# Altium PCB PCB1.PcbDoc
Units mil, origin at the board's own origin, x right, y up, seen from the top; angles counter-clockwise.
Board outline 1751.97 x 1200.79 mil, 2 copper layers (Top Layer, Bottom Layer); 20 components, 31 nets, 95 pads, 28 vias.
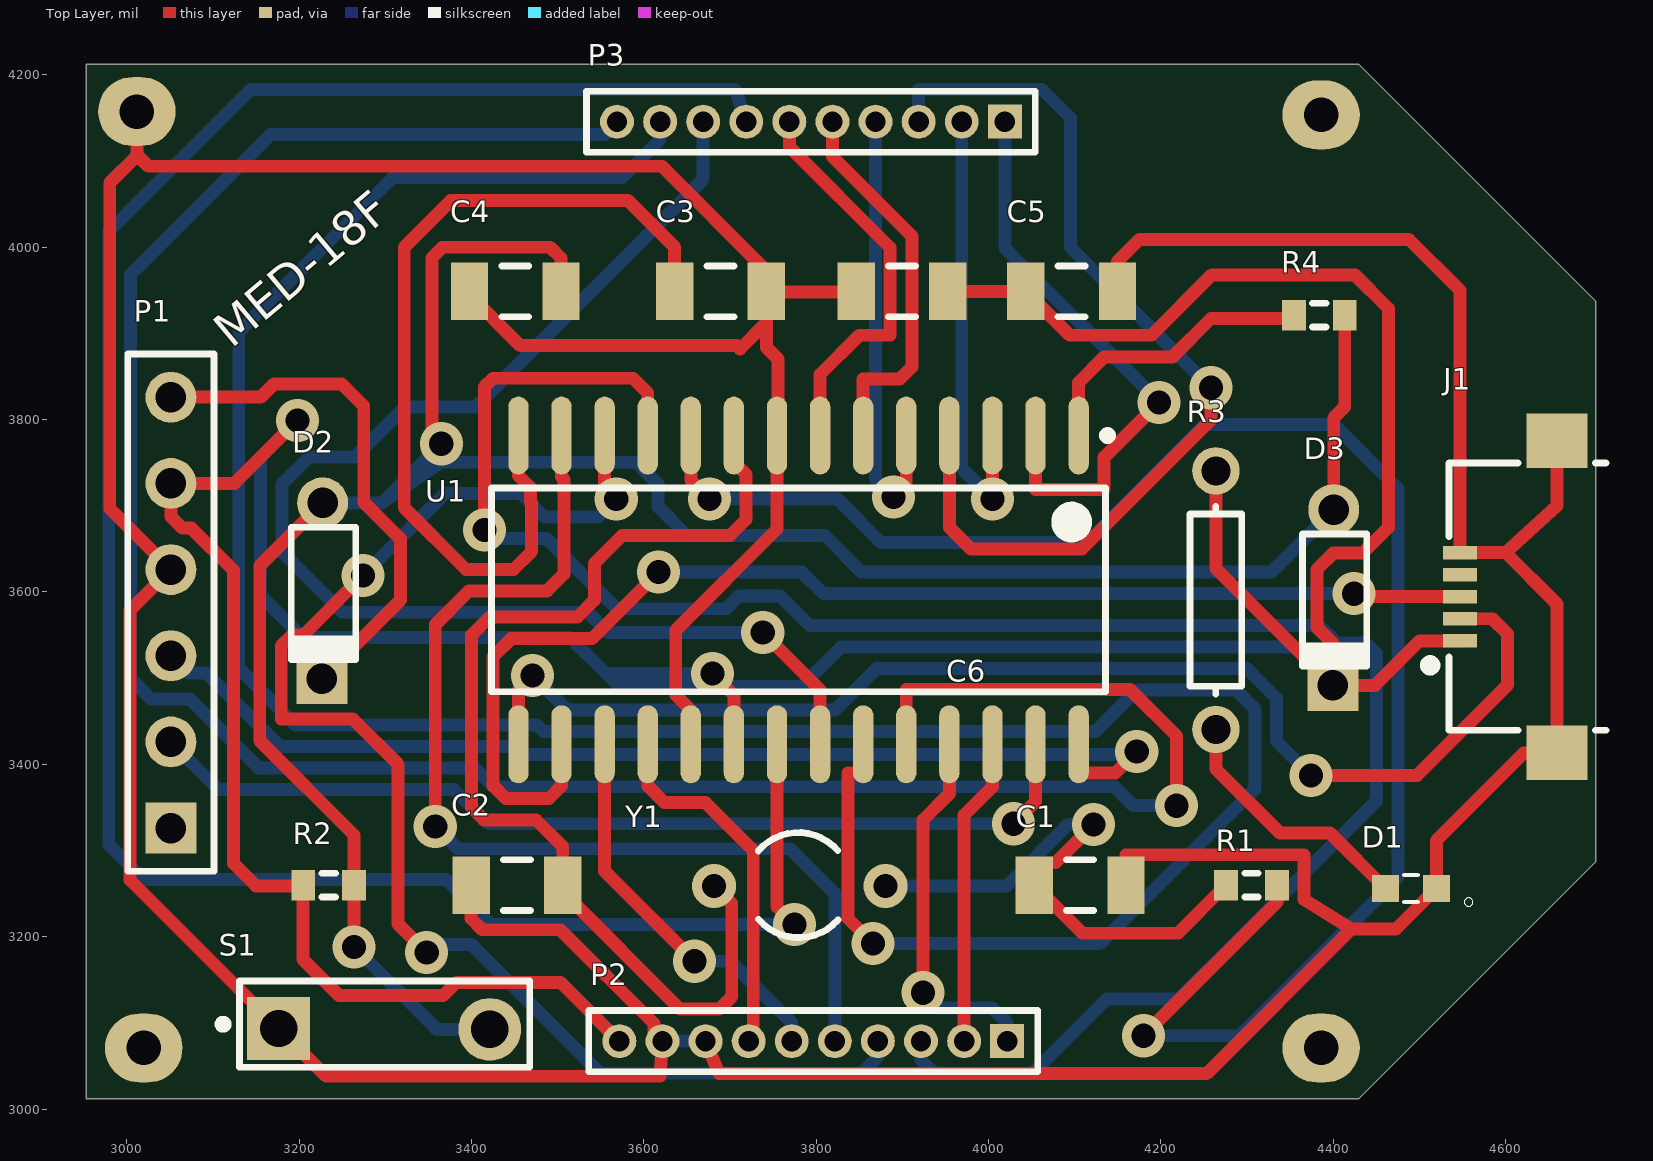
[diagram p0: Top Layer view]
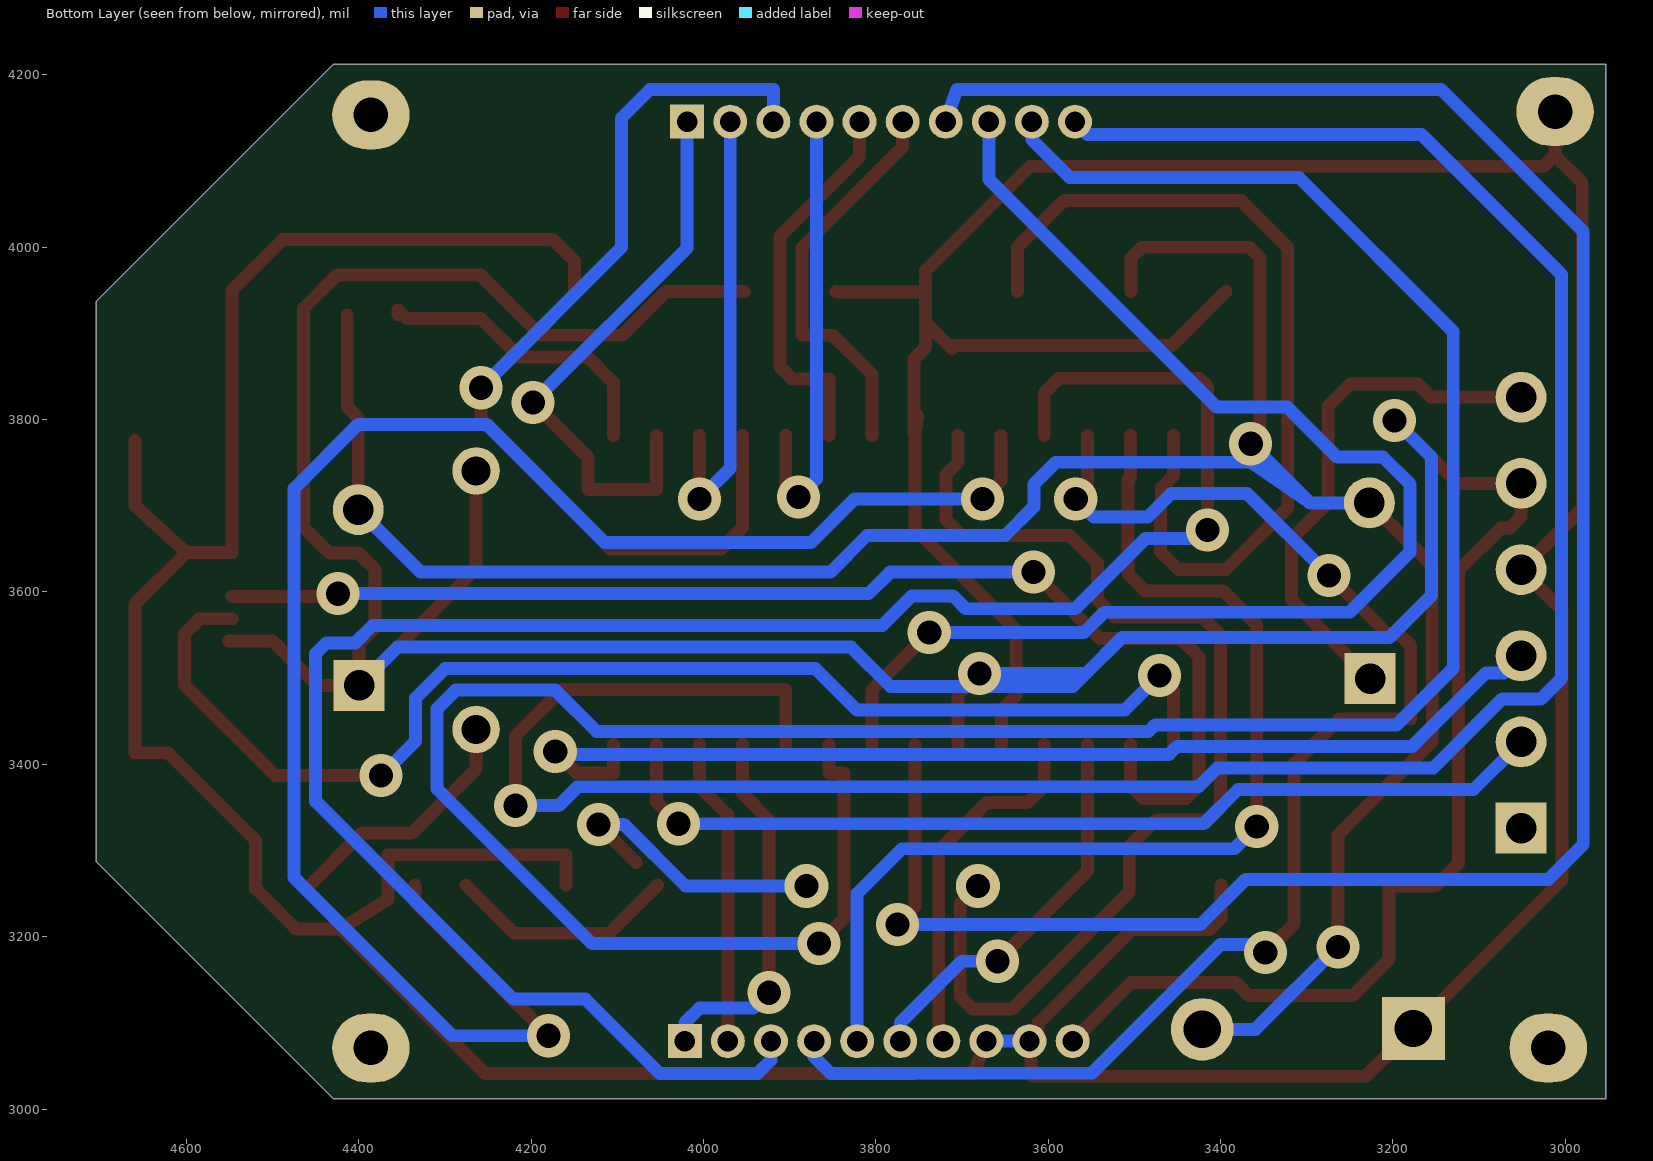
[diagram p1: Bottom Layer view, seen from below]
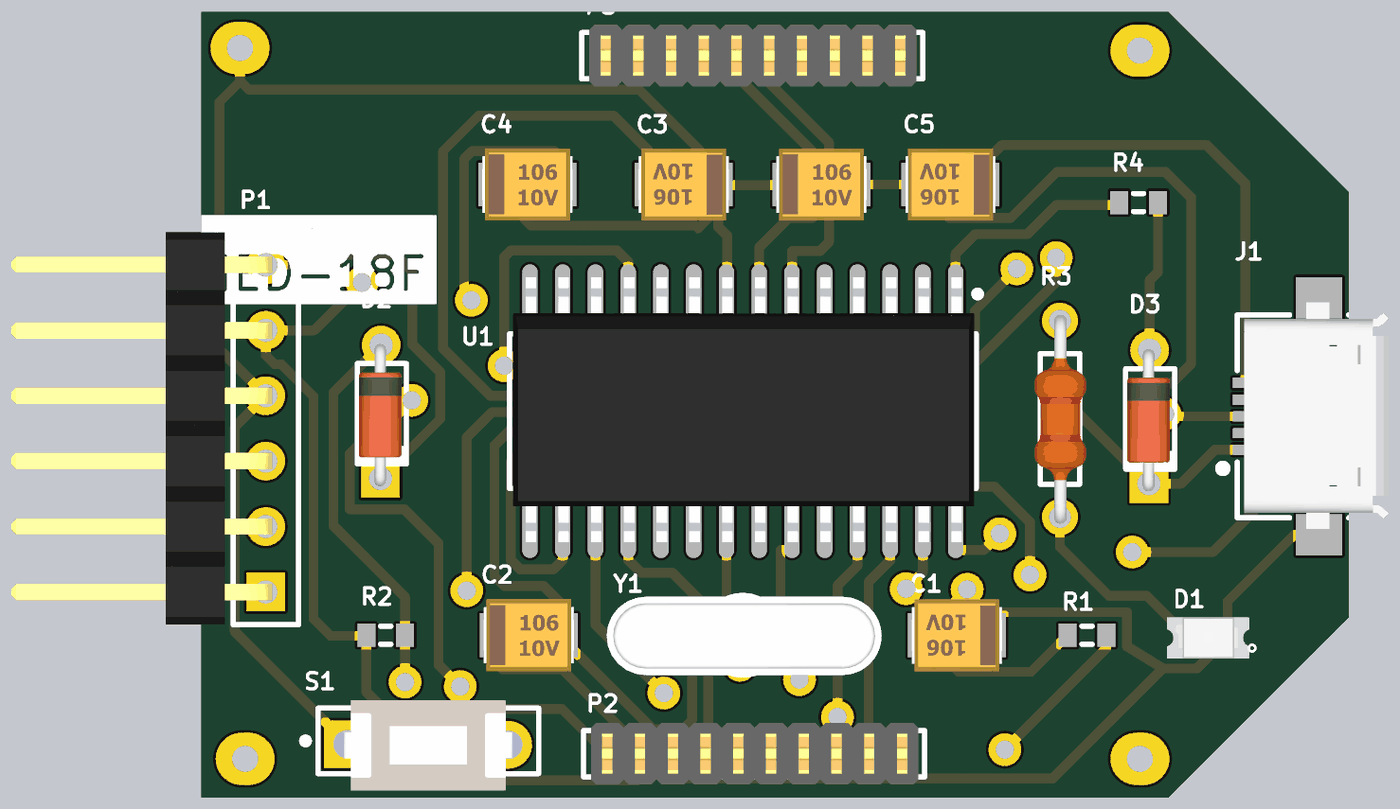
[diagram p2: 3D render of the assembled board from above, using the file's embedded part models]

## Layer stack, top to bottom
Top Solder: solder mask 0.4, Solder Resist, Dk 3.5
Top Layer: signal copper 1.4
Dielectric 1: dielectric 12.6, FR-4, Dk 4.8
Bottom Layer: signal copper 1.4
Bottom Solder: solder mask 0.4, Solder Resist, Dk 3.5

## Board outline
2952.76,3011.81 2952.76,4212.6 4429.13,4212.6 4704.72,3937.01 4704.72,3287.4 4429.13,3011.81

## Design rules (kind name [scope] priority, off if disabled: settings)
Clearance [All] p1: gap=10 ignorepadtopadclearanceinfootprint=FALSE except(0: Arc-Hole Track-Hole SMDPad-Hole THPad-Hole Via-Hole Fill-Hole Poly-Hole Region-Hole Text-Hole)
PolygonConnect [All] p1: connectstyle=Relief reliefconductorwidth=10 reliefentries=4 polygonreliefangle="90 Angle" airgapwidth=10
RoutingVias [All] p1: holewidth=28 width=50 viastyle="Through Hole" minholewidth=28 minwidth=50 maxholewidth=28 maxwidth=50
SolderMaskExpansion [All] p1: expansion=4
Width [All] p1: maxlimit=15 minlimit=15 preferedwidth=15
30 further rules are at their usual default settings.

## Components (designator, comment, footprint, x,y, rotation, side; value= is the part's Value field where it differs from the comment)
C1 "Cap Semi" C1206 4106.3,3259.84 r180 top value=15pF
C2 "Cap Semi" C1206 3452.76,3259.84 r0 top value=15pF
C3 "Cap Semi" C1206 3688.98,3948.82 r180 top value=470nF
C4 "Cap Semi" C1206 3450.79,3948.82 r0 top value=100nF
C5 "Cap Semi" C1206 4096.46,3948.82 r180 top value=100nF
C6 "Cap Semi" C1206 3899.61,3948.82 r0 top value=100nF
D1 "LTW-C191TS5" LEDM1608X55_LTW-C191TS5(PRIMARY) 4490.16,3255.91 r180 top
D2 "Diode 1N4148" DO-35 3228.35,3598.43 r270 top
D3 "Diode 1N4148" DO-35 4401.57,3590.55 r270 top locked
J1 "USB3070-XX-X_REVE" GCT_USB3070-XX-X_REVE 4659.45,3594.49 r90 top
P1 "Header 6" HDR1X6 3051.18,3325.98 r90 top
P2 "MHDR1X10" MHDR1X10 4021.65,3078.74 r180 top
P3 "MHDR1X10" MHDR1X10 4018.9,4145.67 r180 top
R1 "Res3" J1-0603 4305.12,3259.84 r0 top value=470
R2 "Res3" J1-0603 3234.25,3259.84 r0 top value=10K
R3 "Res1" AXIAL-0.3 4263.78,3590.55 r270 top value=220
R4 "Res3" J1-0603 4383.86,3921.26 r180 top value=1K
S1 "SW-PB" SPST-2 3299.21,3098.43 r0 top
U1 "PIC18F2550-I/SO" SOIC-SO28_N 3779.53,3602.36 r270 top
Y1 "XTAL" R38 3779.53,3259.84 r270 top

## Footprints (in the part's own frame and the unit in brackets; to place one, negate y for a bottom-side part, rotate by r counter-clockwise, add the part's x,y. Pads: shape width x height; smd on the part's side, far side on the other; paste and mask are expansions set on the pad)
AXIAL-0.3 [mm] "Axial Device, Thru-Hole; 2 Leads; 0.3 in Pin Spacing"
  round 1.4 hole 0.85: 1(-3.81,0) 2(3.81,0)
  silkscreen extent -2.77,-0.76 2.77,0.76, body extent -4.04,-0.98 4.06,1.02, height 2.27
C1206 [mm] "Chip Capacitor, Body 3.2x1.6mm, IPC High Density"
  rect 1.1x1.7 smd: 1(-1.35,0) 2(1.35,0)
  silkscreen extent -0.4,-0.75 0.4,0.75, body extent -1.75,-1.4 1.75,1.4, height 1.91
DO-35 [mm] "Diode, Axial; Body 3.8 x 1.9 mm (LxDia. max), Lead Dia. 0.53 mm (max)"
  round 1.5 hole 0.9: 1(-2.667,-0.025)
  rect 1.5x1.5 hole 0.9: 2(2.515,-0.051)
  silkscreen extent -1.95,-0.95 2.05,0.95, body extent -2.71,-0.89 2.81,0.76, height 1.76
GCT_USB3070-XX-X_REVE [mm]
  rect 0.4x1 smd: 1(-1.3,2.85) 2(-0.65,2.85) 3(0,2.85) 4(0.65,2.85) 5(1.3,2.85)
  rect 1.6x1.8 smd: 6(4.6,0) 7(-4.6,0)
  silkscreen extent -3.94,-1.45 3.94,3.83, body extent -4.38,-2.7 4.42,2.9, height 2.77
HDR1X6 [mm] "Connector; Header; 6 Position"
  rect 1.5x1.5 hole 0.9: 1(0,0)
  round 1.5 hole 0.9: 2(2.54,0) 3(5.08,0) 4(7.62,0) 5(10.16,0) 6(12.7,0)
  silkscreen extent -1.27,-1.27 13.97,1.27, body extent -1.27,-0.25 13.97,9.88, height 2.57
J1-0603 [mm] "Chip Resistor, Body 1.6x0.8mm, IPC High Density"
  rect 0.7x0.9 smd: 1(-0.75,0) 2(0.75,0)
  silkscreen extent -0.2,-0.35 0.2,0.35, body extent -0.85,-0.48 0.85,0.48, height 0.9
LEDM1608X55_LTW-C191TS5(PRIMARY) [mm]
  rect 0.8x0.8 smd: A(0.75,0) C(-0.75,0)
  silkscreen extent -1.83,-0.4 0.2,0.53, body extent -1.6,-0.8 1.6,0.8, height 1.1
MHDR1X10 [mm] "Connector; Header; 10 Position"
  rect 1x1 hole 0.6: 1(0,0)
  round 1 hole 0.6: 2(1.27,0) 3(2.54,0) 4(3.81,0) 5(5.08,0) 6(6.35,0) 7(7.62,0) 8(8.89,0) 9(10.16,0) 10(11.43,0)
  silkscreen extent -0.9,-0.9 12.33,0.9, body extent -0.66,-1.21 12.04,1.19, height 2.52
R38 [mm] "Crystal, Thru-Hole; 2 Leads; Body 3.1 x 8.2 mm (Dia.xH)"
  round 1.3 hole 0.7: 1(0.025,2.565) 2(0.025,-2.489)
  silkscreen extent -1.55,-1.19 1.55,1.17, body extent -1.5,-5.28 1.55,5.38, height 3.09
SOIC-SO28_N [mm] "SOIC, 28-Leads, Body 17.9x7.5mm, Pitch 1.27mm, IPC Medium Density"
  oval 2.3x0.6 smd: 1(-4.55,8.255) 2(-4.55,6.985) 3(-4.55,5.715) 4(-4.55,4.445) 5(-4.55,3.175) 6(-4.55,1.905) 7(-4.55,0.635) 8(-4.55,-0.635) 9(-4.55,-1.905) 10(-4.55,-3.175) 11(-4.55,-4.445) 12(-4.55,-5.715) 13(-4.55,-6.985) 14(-4.55,-8.255) 15(4.55,-8.255) 16(4.55,-6.985) 17(4.55,-5.715) 18(4.55,-4.445) 19(4.55,-3.175) 20(4.55,-1.905) 21(4.55,-0.635) 22(4.55,0.635) 23(4.55,1.905) 24(4.55,3.175) 25(4.55,4.445) 26(4.55,5.715) 27(4.55,6.985) 28(4.55,8.255)
  silkscreen extent -4.67,-9.05 3,9.23, body extent -5.21,-8.92 5.09,8.98, height 2.72
SPST-2 [mm] "Switch; 2 Leads"
  rect 1.85x1.85 hole 1.1: 1(-3.124,-0.127)
  round 1.85 hole 1.1: 2(3.099,-0.152)
  silkscreen extent -4.89,-1.27 4.28,1.27, body extent -3.84,-1.93 3.84,1.57, height 5

## Part data
C1 C2 C3 C4 C5 C6: "Capacitor (Semiconductor SIM Model)", LatestRevisionDate=29-May-2009, LatestRevisionNote="IPC-7351 Footprint Added.", PackageDescription="Chip Capacitor", PackageReference=C1206, Published=8-Jun-2000, Publisher="Altium Limited"
D1: "Yellow 1.6 x 0.8 x 0.55 mm 130%C2%B0 Tinted/Diffused 180 mcd 3.15V LED Surface Mount", Package="0603 Lite-On", Availability=Good, MF=Lite-On, MP=LTW-C191TS5, Price="0.19 USD"
D2 D3: "High Conductance Fast Diode", Code_JEDEC=DO-204-AH, ComponentLink1Description="Manufacturer Link", ComponentLink1URL=http://www.fairchildsemi.com/, ComponentLink2Description=Datasheet, ComponentLink2URL=http://www.fairchildsemi.com/ds/1N%2F1N4148.pdf, DatasheetVersion=1997, LatestRevisionDate=17-Jul-2002, LatestRevisionNote="Re-released for DXP Platform.", PackageDescription="Diode, Axial; Body 3.8 x 1.9 mm (LxDia. max), Lead Dia. 0.53 mm (max)", PackageReference=DO-35, Published=8-Jun-2000, Publisher="Altium Limited"
J1: "5 Position Surface Mount Right Angle Micro USB 2.0 Connector", Package=None, Availability=Good, MF="Global Connector Technology", MP=USB3070-30-A, Price="0.39 USD"
P1: "Header, 6-Pin", LatestRevisionDate=17-Jul-2002, LatestRevisionNote="Re-released for DXP Platform.", Publisher="Altium Limited"
P2 P3: "Header, 10-Pin", LatestRevisionDate=17-Jul-2002, LatestRevisionNote="Re-released for DXP Platform.", Publisher="Altium Limited"
R1 R2 R3 R4: "Resistor", Published=8-Jun-2000, Publisher="Altium Limited"
  R1 R2 R4: LatestRevisionDate=29-May-2009, LatestRevisionNote="IPC-7351 Footprint Added.", PackageDescription="Chip Resistor", PackageReference=J1-0603
  R3: LatestRevisionDate=17-Jul-2002, LatestRevisionNote="Re-released for DXP Platform.", PackageDescription="Axial Device, Thru-Hole; 2 Leads; 0.3 in Pin Spacing", PackageReference=AXIAL-0.3
S1: "Switch", LatestRevisionDate=17-Jul-2002, LatestRevisionNote="Re-released for DXP Platform.", PackageDescription="Switch; 2 Leads", PackageReference=SPST-2, Published=24-Mar-1999, Publisher="Altium Limited"
U1: "High Performance, Enhanced Flash, USB Microcontroller with nanoWatt Technology, 32K Flash, 28-Pin SOIC, Industrial Temperature Range", Supplier Part Number 1=PIC18F2550-I/SO-ND, Code_JEDEC=MS-013, ComponentLink1Description=Datasheet, ComponentLink1URL=http://ww1.microchip.com/downloads/en/DeviceDoc/39632e.pdf, ComponentLink2Description="Packaging Specification", ComponentLink2URL=http://www.microchip.com/stellent/groups/techpub_sg/documents/packagingspec/en012702.pdf, ComponentLink3Description="Microchip.com Home", ComponentLink3URL=http://www.microchip.com/, DatasheetVersion="revE, Aug-2008", LatestRevisionDate=02-Dec-2009, LatestRevisionNote="Updated to datasheet revision E, Aug-2008", PackageDescription="28-Lead Plastic Small Outline (SO) - Wide 7.50mm Body [SOIC]", PackageReference=SOIC-SO28, PackageVersion="revBB, Aug-2009", Published=29-Jan-2009, Publisher="Altium Limited", Supplier 1=Digi-Key, Supplier 2=Farnell, Supplier 3=Farnell, Supplier Part Number 2=1660053, Supplier Part Number 3=9321268
Y1: "Crystal Oscillator", LatestRevisionDate=17-Jul-2002, LatestRevisionNote="Re-released for DXP Platform.", PackageDescription="Crystal, Thru-Hole; 2 Leads; Body 3.1 x 8.2 mm (Dia.xH)", PackageReference=R38, Published=8-Jun-2000, Publisher="Altium Limited"

## Free pads (board coordinates)
  oval 90x80 hole 40: 8(3011.81,4157.48) 9(3019.69,3070.87) 10(4385.83,3070.87) 11(4385.83,4153.54)

## Via types
v1: diameter 50, hole 28, Top Layer to Bottom Layer, 28 vias

## Nets (pads, with @x,y where several pads share a name; then routed paths per layer and width w, separated by ;. In a path a pad name is that pad's centre, name@x,y a point inside that pad or via, vN(x,y) a via of type N, cw(c..) or ccw(c..) an arc to the next point about the centre after c; other vN are vias at no path point)
D+: J1.3 U1.16 | length 1464
  Top Layer w15: U1.16 3504.53,3375 3489.98,3360.45 3439.76,3360.45 3425.22,3375 3425.22,3525 3446.04,3545.82 3539.82,3545.82 v1(3617,3623) ; v1(4424,3598) 4427.51,3594.49 J1.3
  Bottom Layer w15: v1(3617,3623) 3783.4,3623 3808.4,3598 v1(4424,3598)
D-: J1.2 U1.15 | length 1500
  Top Layer w15: U1.15 3454.53,3486.53 v1(3471,3503) ; v1(4374,3387) 4497,3387 4602.36,3492.36 4602.36,3551.18 4584.65,3568.9 J1.2
  Bottom Layer w15: v1(3471,3503) 3511.03,3462.97 3821.97,3462.97 3870,3511 4300,3511 4334,3477 4334,3427 v1(4374,3387)
GND: C1.1 C2.1 C3.1 C4.1 C5.1 C6.1 D1.C J1.5 J1.6 J1.7 P1.4 P2.8 P2.9 pad.8 S1.1 U1.8 U1.19 | length 6789.7
  Top Layer w15: 3011.81,4106.3 2980.32,4074.8 2980.32,3696.85 P1.4 3003.87,3578.68 3003.87,3265.76 S1.1 3231.64,3038 3618.65,3038 P2.9 3611.93,3088.46 3611.93,3099.22 3503.15,3208 3412.5,3208 3399.48,3221.02 3399.48,3259.72 C2.1 ; pad.8 3011.69,4157.35 3011.69,4107.31 3025,4094 3621,4094 3742.13,3972.87 C3.1 C3.1@3742.13,3948 ; C4.1@3393.7,3948.82 3456.69,3885.83 3707.58,3885.83 3711.52,3881.89 3742,3912.37 ; U1.19 3654.4,3423.35 3654.4,3463.1 3637.03,3480.47 3637.03,3555.5 3754.53,3673 U1.8 3754.28,3783.24 3751.4,3803.95 U1.8@3753.25,3806.41 ; P2.8 3687.5,3041 4253.05,3041 4421.05,3209 ; U1.8@3755.91,3783.46 3755.91,3870.08 3742.13,3883.86 C3.1@3742.13,3948 ; C6.1 3846.33,3948.69 3846.33,3948 C3.1@3742.13,3948 ; C5.1 4149.61,3983.61 4175,4009 4488,4009 4547,3950 4547,3645.67 J1.5 4600,3645.67 ; C1.1 4159.45,3295.06 4365.93,3295.06 4365.93,3243.07 4421.05,3209 ; J1.6 4659.45,3700 4600,3645.67 ; 4421.05,3209 4472.78,3209 D1.C 4519.68,3311.61 4621.46,3413.39 J1.7 4659.45,3586.22 4600,3645.67
  Bottom Layer w15: P2.9 P2.8
MCLR: R4.2 U1.1 | length 351.8
  Top Layer w15: U1.1 4104.53,3843 4134.38,3872.85 4213.76,3872.85 4258.23,3917.32 4344.69,3917.32 4354.33,3926.97 R4.2
NetC1_2: C1.2 R1.1 Y1.1 | length 601.9
  Top Layer w15: C1.2 4108.99,3204 4219.75,3204 R1.1 ; 4078,3286 v1(4122,3330)
  Bottom Layer w15: Y1.1 4020.84,3258.84 4092,3330 v1(4122,3330)
NetC4_2: C4.2 D2.1 D3.1 R2.2 R4.1 S1.2 | length 2820.9
  Top Layer w15: D2.1 3154.32,3630.4 3154.32,3427.4 3263.78,3317.94 R2.2 v1(3263.78,3188.22) ; v1(3365,3772) 3354,3783 3354,3987.5 3366.5,4000 3491.44,4000 3503.94,3987.5 C4.2 ; D3.1 4400.57,3802 4413.39,3814.81 R4.1
  Bottom Layer w15: D2.1 3296.43,3703.43 ; v1(3263.78,3188.22) 3359.57,3092.43 S1.2 ; v1(3365,3772) 3296.43,3703.43 ; D3.1 4328.02,3623 3852.65,3623 3810.15,3665.5 3650,3665.5 3616.6,3698.9 3616.6,3725 3591.1,3750.5 3365,3750.5 3296.43,3703.43
NetD1_A: D1.A R3.2 | length 300.2
  Top Layer w15: R3.2 4263.78,3394.67 4338.39,3320.06 4396.47,3320.06 D1.A
NetD2_2: D2.2 P1.6 | length 612.6
  Top Layer w15: P1.6 3155.5,3825.98 3171.02,3841.5 3249.29,3841.5 3275,3815.79 3275,3704.21 3317.44,3661.77 3317.44,3590.52 D2.2
NetP2_1: P2.1 U1.25 | length 434.3
  Top Layer w15: v1(3924,3135) 3924,3335.47 3954.53,3366 U1.25
  Bottom Layer w15: v1(3924,3135) 3942,3117 4004.65,3117 4021.65,3100 P2.1
NetP2_2: P2.2 U1.26 | length 358.1
  Top Layer w15: P2.2 3971.65,3341.01 4004.53,3373.88 U1.26
NetP2_3: P2.3 U1.11 | length 2382.3
  Top Layer w15: v1(3415,3672) 3415,3838 3425,3848 3587.5,3848 3604.53,3830.97 U1.11
  Bottom Layer w15: v1(3415,3672) 3425.1,3661.9 3487.2,3661.9 3568.6,3580.5 3695.5,3580.5 3710.5,3595.5 3758,3595.5 3792.5,3561 4384,3561 4404,3541 4437.5,3541 4450,3528.5 4450,3357 4220.5,3127.5 4137,3127.5 4050.5,3041 3937.5,3041 3921.65,3056.85 P2.3
NetP2_4: P2.4 U1.12 | length 1651.7
  Top Layer w15: v1(3274,3619) 3205,3550 3191.82,3550 3179.32,3537.5 3179.32,3452.4 3262.6,3452.4 3315,3400 3315,3214.56 v1(3348.06,3181.5) ; U1.12 3554.53,3721.47 v1(3568,3708)
  Bottom Layer w15: v1(3274,3619) 3369.5,3714.5 3457,3714.5 3484.5,3687 3547,3687 v1(3568,3708) ; v1(3348.06,3181.5) 3357.66,3191.1 3399.9,3191.1 3549.45,3041.55 3756.25,3041.55 3756.71,3041.09 3852.12,3041.09 3871.65,3060.63 P2.4
NetP2_5: P2.5 U1.13 | length 1236.9
  Top Layer w15: v1(3358,3328) 3358,3562 3397,3601 3487.5,3601 3507.5,3621 3507.5,3730.5 3504.53,3733.47 U1.13
  Bottom Layer w15: v1(3358,3328) 3384,3302 3769.65,3302 3821.65,3250 P2.5
NetP2_6: P2.6 U1.17 | length 458.5
  Top Layer w15: U1.17 3554.53,3276 v1(3659,3171.53)
  Bottom Layer w15: v1(3659,3171.53) 3700.13,3171.53 3771.65,3100 P2.6
NetP2_7: P2.7 U1.18 | length 425.2
  Top Layer w15: U1.18 3604.53,3375 3624.06,3355.47 3671.53,3355.47 3727,3300 3727,3084.09 P2.7
NetP3_1: P3.1 U1.2 | length 669.8
  Top Layer w15: U1.2 4054.53,3718.72 4133.84,3718.72 4133.84,3755.84 v1(4198,3820)
  Bottom Layer w15: P3.1 4018.9,3999.1 v1(4198,3820)
NetP3_2: P3.2 U1.3 | length 525.9
  Top Layer w15: v1(4004.53,3708) U1.3
  Bottom Layer w15: P3.2 3968.9,3743.63 v1(4004.53,3708)
NetP3_3: P3.3 U1.4 | length 1127.3
  Top Layer w15: U1.4 3954.53,3675 3979.53,3650 4108.34,3650 4258,3799.66 v1(4258,3837)
  Bottom Layer w15: P3.3 3918.9,4183 4062,4183 4095,4150 4095,4000 v1(4258,3837)
NetP3_4: P3.4 U1.5 | length 521.5
  Top Layer w15: v1(3889.76,3710.24) 3904.53,3725 U1.5
  Bottom Layer w15: P3.4 3868.9,3731.1 v1(3889.76,3710.24)
NetP3_5: P3.5 U1.6 | length 450.6
  Top Layer w15: P3.5 3818.9,4105.1 3911,4013 3911,3861 3897,3847 3854.53,3847 U1.6
NetP3_6: P3.6 U1.7 | length 467
  Top Layer w15: P3.6 3768.9,4116.5 3885.61,3999.79 3885.61,3897.85 3850,3897.85 3804.53,3852.38 U1.7
NetP3_7: P3.7 U1.21 | length 2597.9
  Top Layer w15: U1.21 3754.53,3234.5 v1(3775,3214.03)
  Bottom Layer w15: P3.7 3706,4183 3144,4183 2979.15,4018.15 2979.15,3306.85 3019.5,3266.5 3370.72,3266.5 3423.2,3214.03 v1(3775,3214.03)
NetP3_8: P3.8 U1.22 | length 1534.8
  Top Layer w15: v1(3738,3553) 3804.53,3486.47 U1.22
  Bottom Layer w15: P3.8 3668.9,4078.9 3404.5,3814.5 3322.5,3814.5 3264.4,3756.4 3211.4,3756.4 3180,3725 3180,3646.5 3250,3576.5 3534.97,3576.5 3558.47,3553 v1(3738,3553)
NetP3_9: P3.9 U1.23 | length 3102
  Top Layer w15: U1.23 3854.53,3390 3837,3390 3837,3221 v1(3866,3192)
  Bottom Layer w15: P3.9 3618.9,4124.8 3575,4080.9 3308.9,4080.9 3130,3902 3130,3511.5 3195.69,3445.81 3475.63,3445.81 3483.47,3437.97 4123.9,3437.97 4171.93,3486 4287.5,3486 4309,3464.5 4309,3371.47 4129.53,3192 v1(3866,3192)
NetP3_10: P3.10 U1.24 | length 2862.3
  Top Layer w15: U1.24 3904.53,3487 4164,3487 4218,3433 v1(4218,3352)
  Bottom Layer w15: P3.10 3554.23,4131 3167,4131 3004.15,3968.15 3004.15,3499.85 3028,3476 3073,3476 3153.19,3395.81 3403.82,3395.81 3425.63,3374 4146,3374 4168,3352 v1(4218,3352)
OSC1: C2.2 U1.9 Y1.2 | length 1274.4
  Top Layer w15: Y1.2 3702,3238.37 3702,3130.43 3687.5,3115.93 3642,3115.93 3505.9,3252.02 C2.2 3505.9,3304.55 3475,3335.45 3414.76,3335.45 3400.22,3350 3400.22,3550 3421.22,3571 3523.07,3571 3542.64,3590.57 3542.64,3633.14 3575,3665.5 3700,3665.5 3718.5,3684 3718.5,3736.53 3704.53,3750.5 U1.9
OSC2: R1.2 U1.10 | length 2051.8
  Top Layer w15: U1.10 3654.53,3729.47 v1(3676,3708) ; v1(4179.64,3085) 4334.64,3240 R1.2
  Bottom Layer w15: v1(3676,3708) 3824.5,3708 3875,3657.5 4114.5,3657.5 4251.49,3794.49 4400.51,3794.49 4475,3720 4475,3268.52 4291.48,3085 v1(4179.64,3085)
PGC: P1.2 U1.27 | length 1120
  Top Layer w15: v1(4029,3331) 4054.53,3356.53 U1.27
  Bottom Layer w15: P1.2 3106.36,3370.81 3379.82,3370.81 3419.63,3331 v1(4029,3331)
PGD: P1.3 U1.28 | length 1282.9
  Top Layer w15: U1.28 4104.53,3390 4147,3390 v1(4172,3415)
  Bottom Layer w15: P1.3 3071,3506.16 3092.05,3506.16 3177.4,3420.81 3450.63,3420.81 3459.99,3411.45 4172,3411.45 v1(4172,3415)
VCC: C5.2 C6.2 D3.2 J1.1 P1.5 P2.10 R2.1 R3.1 U1.20 | length 4569.2
  Top Layer w15: v1(3198,3799) 3124.98,3725.98 P1.5 3051.18,3687.5 3064.68,3674 3075,3674 3124,3625 3124,3285 3150,3259 R2.1@3204.73,3259 ; R2.1 R2.1@3204.73,3259 ; P2.10 3503.39,3147 3382.5,3147 3367,3131.5 3246.5,3131.5 3204.73,3173.27 R2.1@3204.73,3259 ; v1(3679.53,3505.47) 3704.53,3480.47 U1.20 ; C6.2 C5.2 4094.27,3897.85 4189,3897.85 4259.15,3968 4425,3968 4464,3929 4464,3675 4434,3645 4400,3645 4381,3626 4381,3559 4399.57,3540.43 D3.2 ; R3.1 4263.78,3627.35 D3.2 ; J1.1@4551.18,3543.31 4500,3543.31 4448.24,3491.55 D3.2
  Bottom Layer w15: v1(3198,3799) 3155,3756 3155,3596.13 3204.13,3547 3514.47,3547 3555.99,3505.47 ; v1(3679.53,3505.47) 3555.99,3505.47 ; D3.2 4355.13,3536 3828.8,3536 3783,3490.2 3571.27,3490.2 3555.99,3505.47
VUSB: C3.2 U1.14 | length 1038.9
  Top Layer w15: U1.14 3454.53,3734.97 3468.5,3721 3468.5,3704.72 3469.57,3703.65 3469.57,3646.74 3448.83,3626 3393.68,3626 3322,3697.68 3322,4000 3376,4054 3581.83,4054 3635.83,4000 C3.2
pads on no net: J1.4 P1.1

## Polygon pours and split planes (outlines as drawn)
no net on Bottom Layer "GND" (solid, remove dead copper, pour order 2): 2952.76,3011.81 4429.13,3011.81 4704.72,3287.4 4704.72,3937.01 4429.13,4212.6 2952.76,4212.6

## Silkscreen, mask and mechanical layers (free items; w line width, h text height)
Top Overlay:
  text "MED-18F" at 3122.05,3881.89 h40 r40
Mechanical 1:
  the board outline again, w10